# EAGLE board inverter-1kw (EAGLE 9.6.2), part 1 of 2
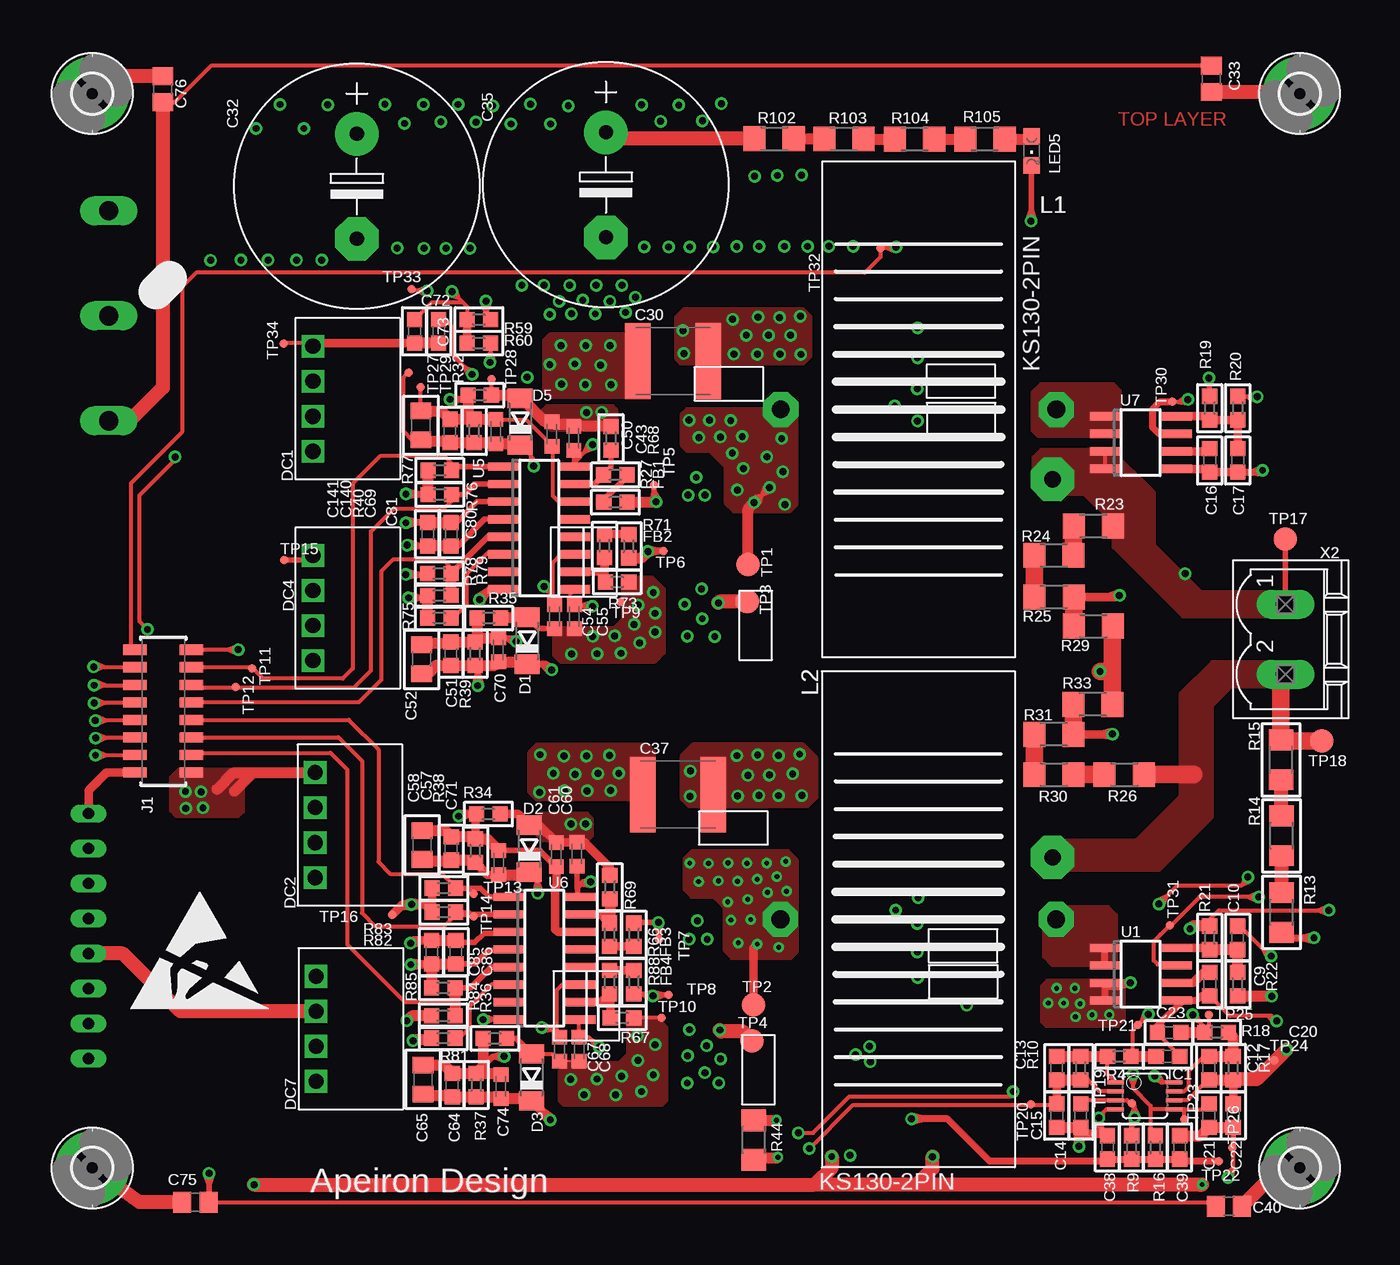
[diagram p0: board, top side]
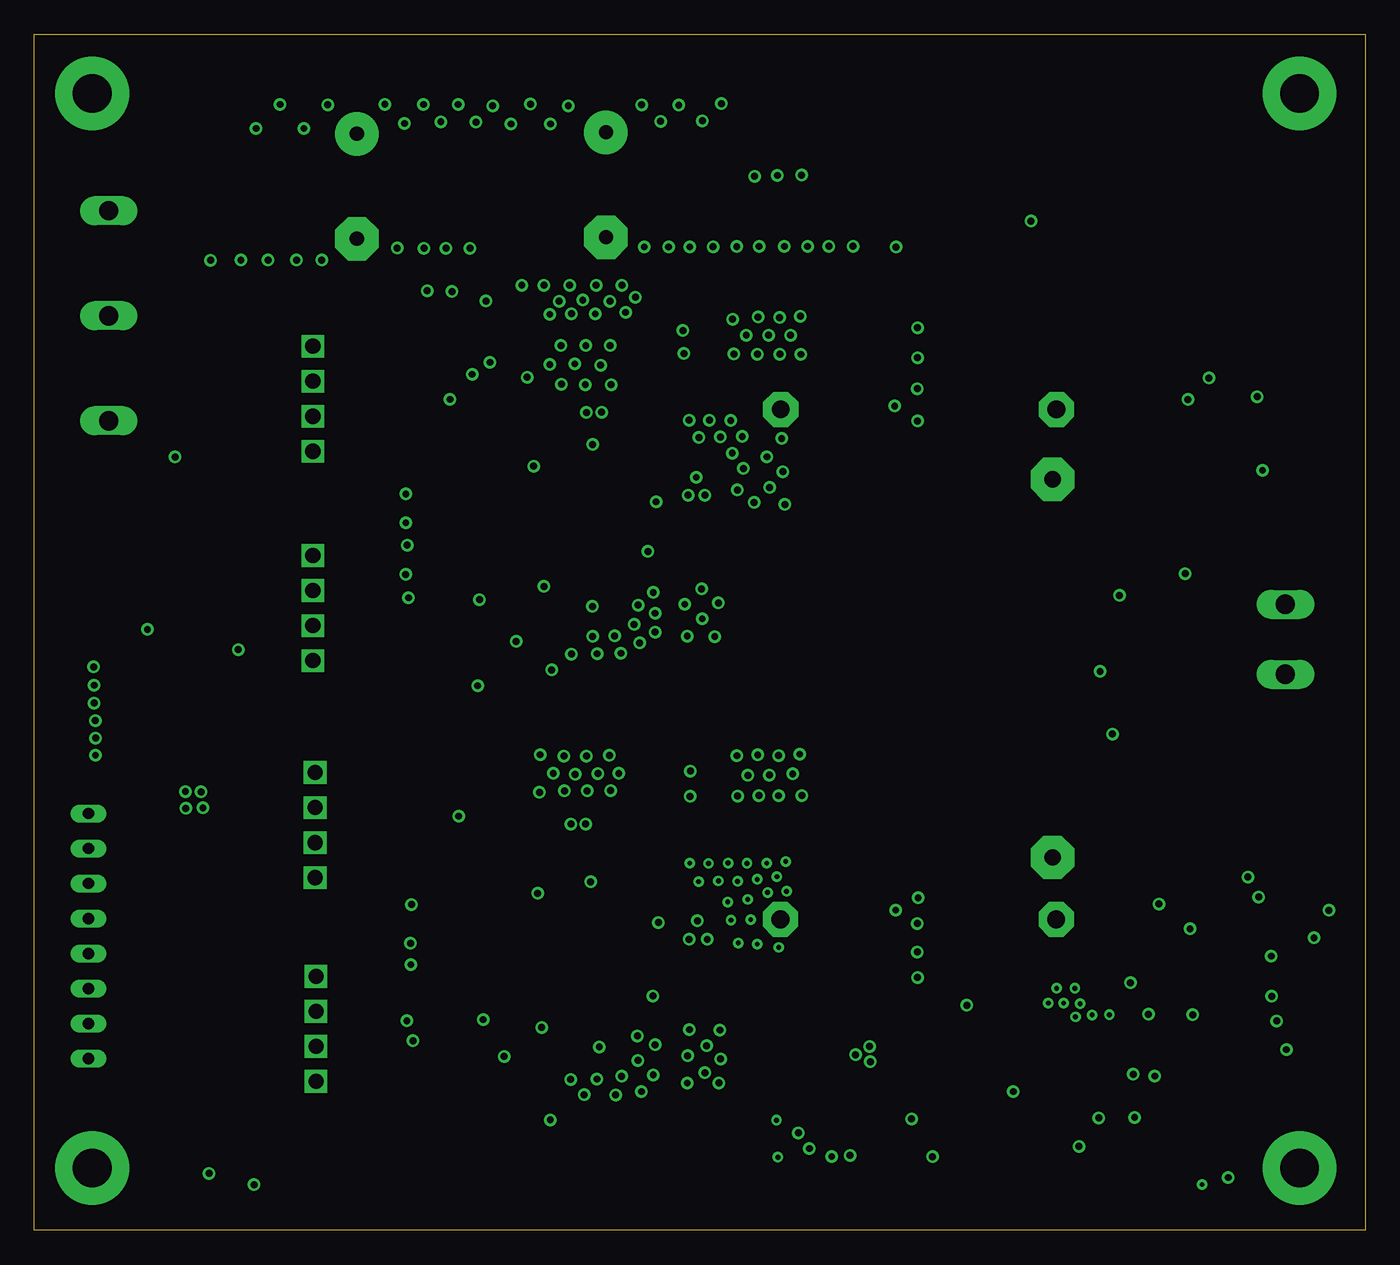
[diagram p1: board, inner layer Route3]
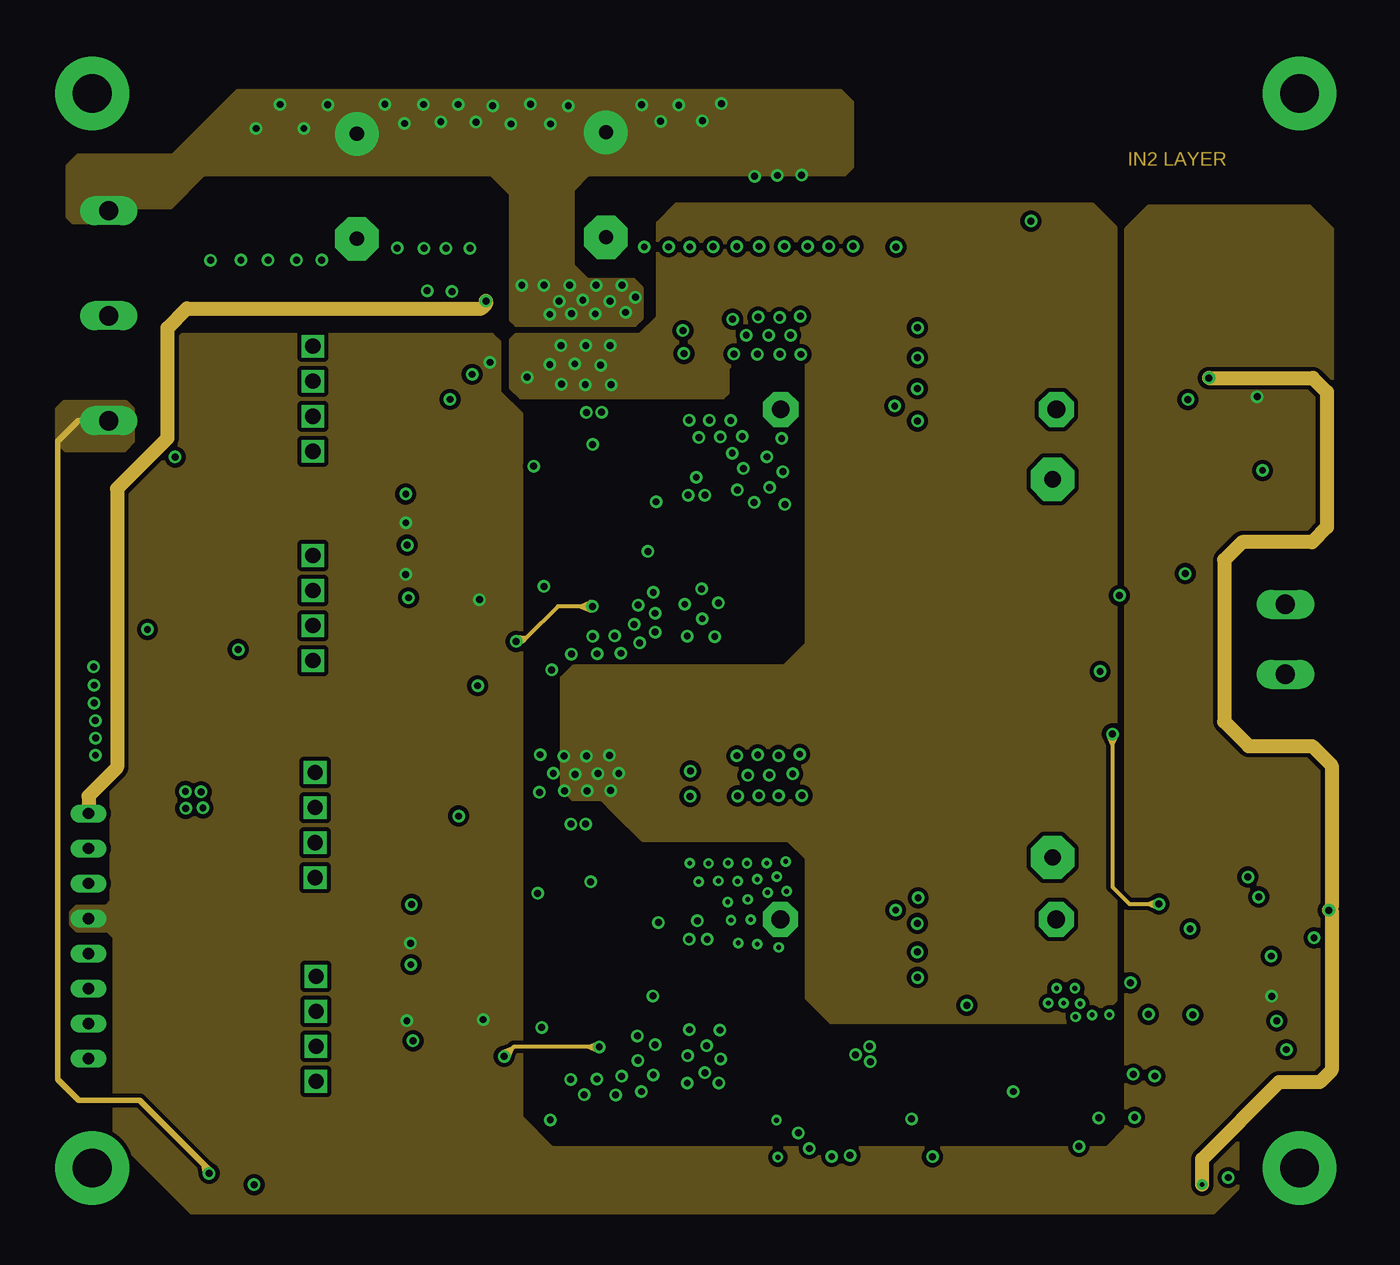
[diagram p2: board, inner layer IN2]
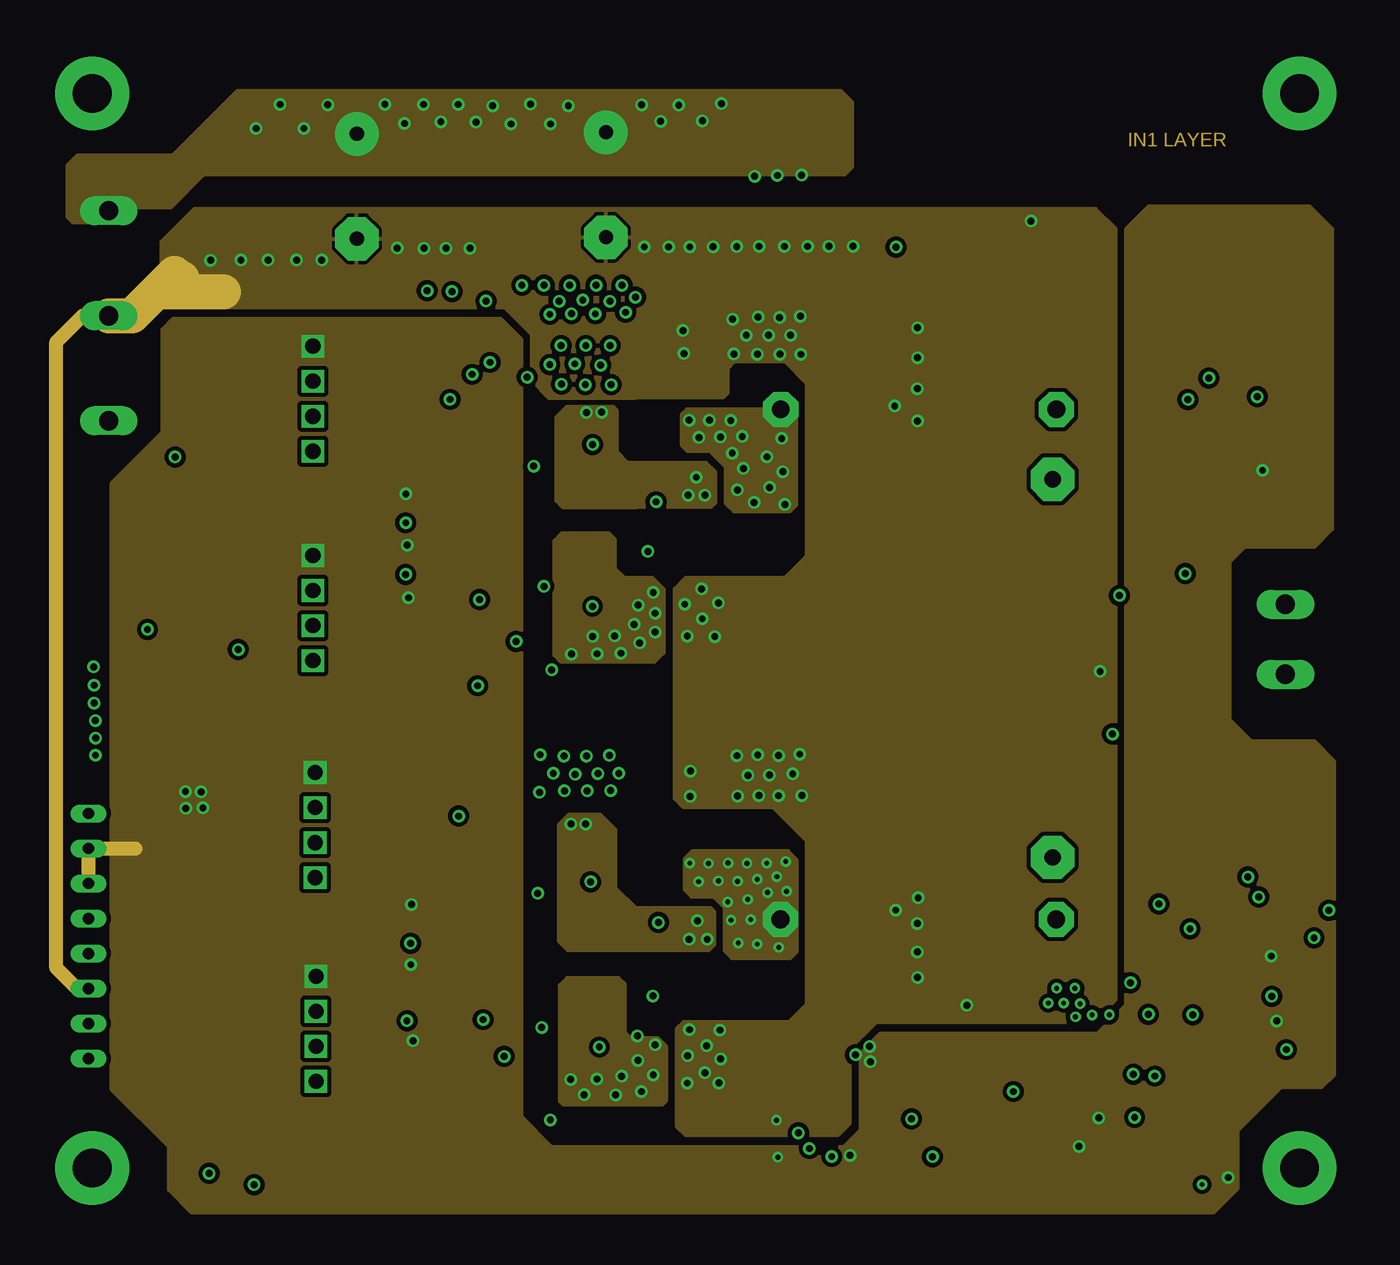
[diagram p3: board, inner layer IN1]
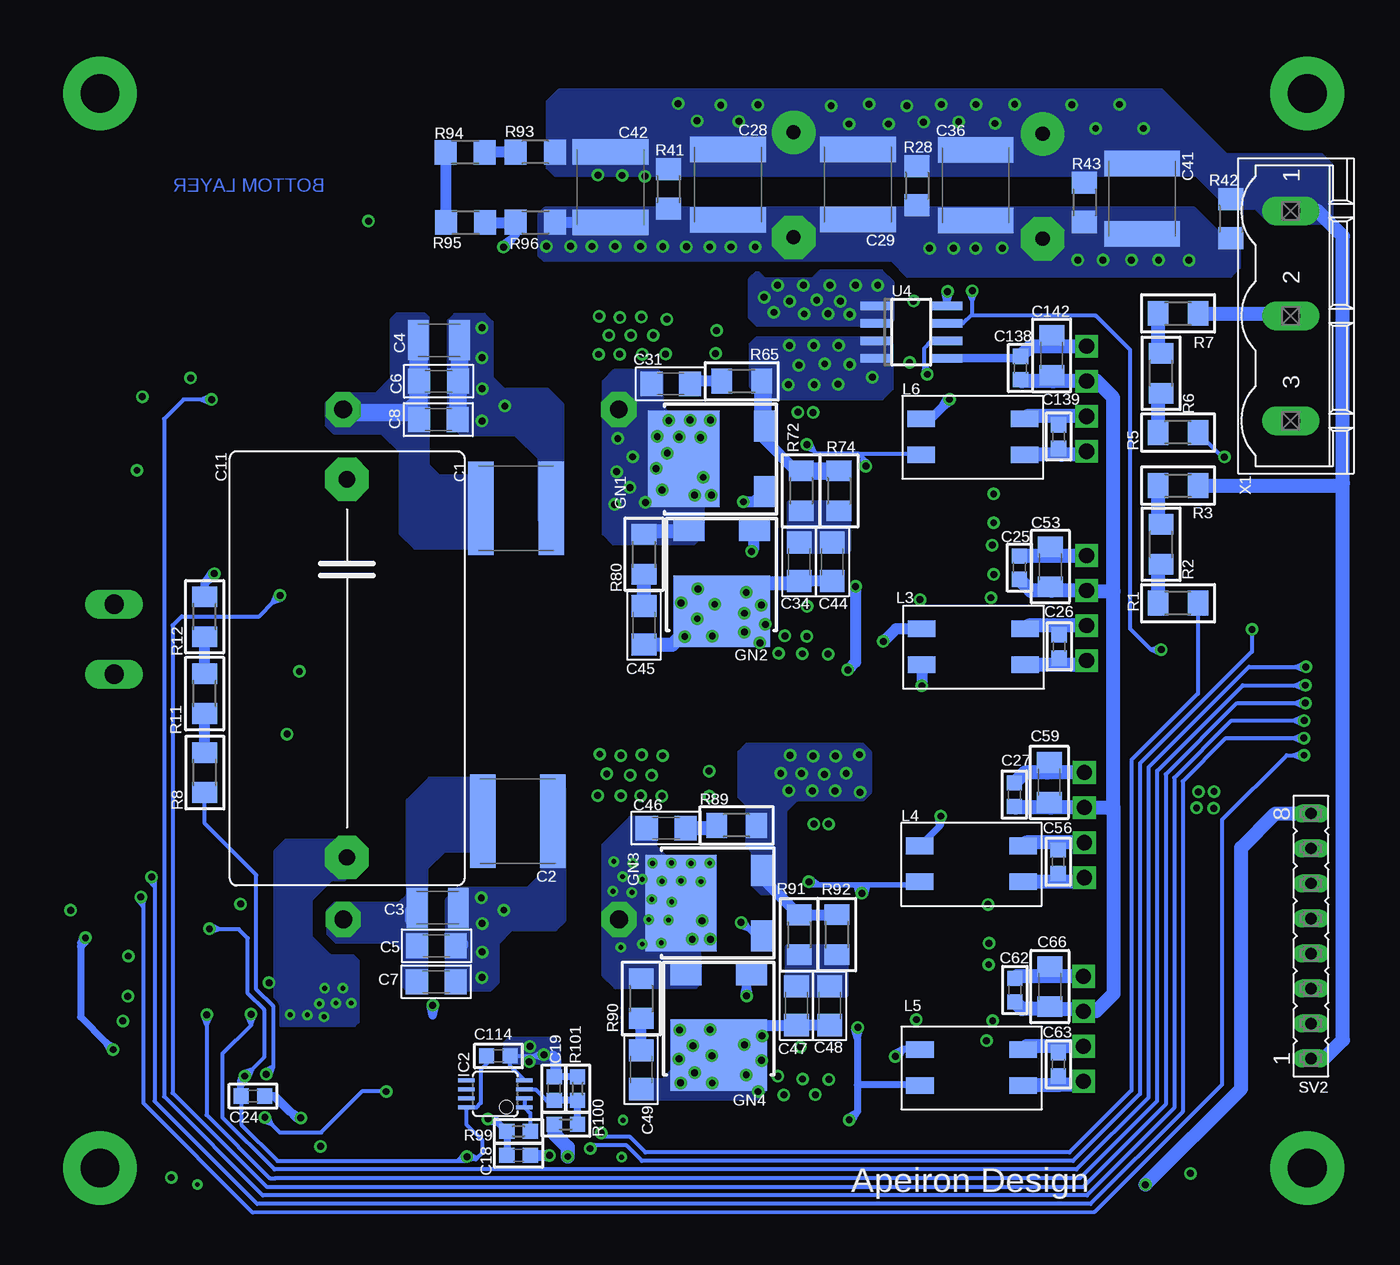
[diagram p4: board, bottom side, seen from below]

No outline drawn. Coordinates in mm, seen from the top.
Copper layers (1+2*3*14+16): Top 0.035mm / dielectric 0.2mm / Route2 0.035mm / dielectric 1mm / Route3 0.035mm / dielectric 0.2mm / IN2 0.035mm / dielectric 0.15mm / Bottom 0.035mm
Design rules "default *": minimum track width 6mil, minimum drill 0.35mm, track to track 11mil, track to pad 11mil, pad to pad 11mil, via to via 11mil, smd to smd 11mil, copper to edge 40mil, drill to drill 6mil, minimum pad ring 10mil, minimum via ring 8mil, stop-mask expansion 4mil, vias tented up to drill 0mil, thermal gap 10mil
tRestrict: 3 lines
bRestrict: 3 lines

## Footprints (pad centres in the part's own frame; a part is rotated, then mirrored left to right if it is on the bottom)
C2225K = smd 1.85 x 6.8: 1 -2.55,0; 2 2.55,0
C1210K = smd 1.5 x 2.9: 1 -1.5,0; 2 1.5,0
C1206 = smd 1.6 x 1.8: 1 -1.4,0; 2 1.4,0
C0603 = smd 1.1 x 1.1: 1 -0.85,0; 2 0.85,0
C27.5B17 = drill 1.194 pad 3.15 octagon: 1 -13.716,0; 2 13.716,0
C2220K = smd 1.85 x 5.5: 1 -2.55,0; 2 2.55,0
E7,5-18 = drill 1.016 pad 3.15: + -3.81,0 | drill 1.016 pad 3.15 octagon: - 3.81,0
C0805 = smd 1.3 x 1.5: 1 -0.95,0; 2 0.95,0
C0603K = smd 1.05 x 1.08: 1 -0.875,0; 2 0.875,0
C0805' = smd 1.2 x 1.5: 1 -1.05,0; 2 1.05,0
C1206' = smd 1.5 x 1.8: 1 -1.45,0; 2 1.45,0
SOD80C = smd 1.4 x 1.8: A 1.7,0; C -1.7,0
RI-0512S/P_DC_DC_5V_12V = drill 1.1 square: 1-IN -3.81,1.27; 2+IN -1.27,1.27; 3-VOUT 1.27,1.27; 4+VOU 3.81,1.27
R0603 = smd 1.1 x 1.1: 1 -0.85,0; 2 0.85,0
TP65H300G4LSG = smd 2.25 x 1.5: D 2.375,-3.25; G -2.375,-3.25 | smd 7 x 5.18: S 0,2.59
2,8-PAD = drill 2.8 pad 5.334: B2,8 0,0
MSOP08 = smd 0.3 x 1.2: 1 -0.976,-2.113; 2 -0.326,-2.113; 3 0.324,-2.113; 4 0.974,-2.113; 5 0.974,2.112; 6 0.324,2.112; 7 -0.326,2.112; 8 -0.976,2.112
62301621021 = smd 0.74 x 1.7: 1 -4.445,-2.05; 2 -4.445,2.05; 3 -3.175,-2.05; 4 -3.175,2.05; 5 -1.905,-2.05; 6 -1.905,2.05; 7 -0.635,-2.05; 8 -0.635,2.05; 9 0.635,-2.05; 10 0.635,2.05; 11 1.905,-2.05; 12 1.905,2.05; 13 3.175,-2.05; 14 3.175,2.05; 15 4.445,-2.05; 16 4.445,2.05
KS130-2PIN = drill 1.3 pad 2.54 octagon: 1 -10,0; 2 10,0
ARYA_COMMON_FILTER = smd 2 x 1.2: 1 -3.75,1.27; 2 -3.75,-1.34; 3 3.75,-1.34; 4 3.75,1.27
CHIPLED_0805 = smd 1.2 x 1.2: A 0,-1.05; C 0,1.05
R1206 = smd 1.5 x 1.8: 1 -1.447,0; 2 1.447,0
R1206' = smd 1.6 x 1.803: 1 -1.422,0; 2 1.422,0
FE08 = drill 0.813 long: 1 -8.89,0; 2 -6.35,0; 3 -3.81,0; 4 -1.27,0; 5 1.27,0; 6 3.81,0; 7 6.35,0; 8 8.89,0
TP17R = smd 1.7 x 1.7: TP 0,0
TP06R = smd 0.6 x 0.6: TP 0,0
SOIC8 = smd 0.6 x 2.2: 1 -1.885,-2.6; 2 -0.615,-2.6; 3 0.655,-2.6; 4 1.925,-2.6; 5 1.925,2.6; 6 0.655,2.6; 7 -0.615,2.6; 8 -1.885,2.6
SI8230-N = smd 0.6 x 2.2: 1 -3.945,-2.45; 2 -2.675,-2.45; 3 -1.405,-2.45; 4 -0.135,-2.45; 5 1.135,-2.45; 6 2.405,-2.45; 7 3.675,-2.45; 8 4.945,-2.45; 9 4.945,2.75; 10 3.675,2.75; 11 2.405,2.75; 12 1.135,2.75; 13 -0.135,2.75; 14 -1.405,2.75; 15 -2.675,2.75; 16 -3.945,2.75
GMSTBV3 = drill 1.397 long: 1 -7.62,0; 2 0,0; 3 7.62,0
MSTBV2 = drill 1.397 long: 1 -2.54,0; 2 2.54,0

## Placement (x,y rotation side)
C1  [C2225K]  61.58,52.4 0 bottom
C2  [C2225K]  61.46,29.7 180 bottom
C3  https://www.ozdisan.com/passive-components/capacitors/smt-smd-and-mlcc-capacitors/C1210C473KCRACTU  [C1210K]  67.27,23.41 180 bottom
C4  https://www.ozdisan.com/passive-components/capacitors/smt-smd-and-mlcc-capacitors/C1210C473KCRACTU  [C1210K]  67.19,64.58 0 bottom
C5  https://www.ozdisan.com/passive-components/capacitors/smt-smd-and-mlcc-capacitors/C3216B103K631NT  [C1206]  67.37,20.65 180 bottom
C6  https://www.ozdisan.com/passive-components/capacitors/smt-smd-and-mlcc-capacitors/C3216B103K631NT  [C1206]  67.21,61.61 0 bottom
C7  https://www.ozdisan.com/passive-components/capacitors/smt-smd-and-mlcc-capacitors/CL31C102JHHNNNE  [C1206]  67.39,18.04 180 bottom
C8  https://www.ozdisan.com/passive-components/capacitors/smt-smd-and-mlcc-capacitors/CL31C102JHHNNNE  [C1206]  67.23,58.83 0 bottom
C9  [C0603]  85.25,17.88 270 top
C10  [C0603]  87.28,21.23 90 top
C11  [C27.5B17]  73.85,40.78 270 bottom
C12  150pF  [C0603]  85.21,11.79 90 top
C13  150pF  [C0603]  74.16,11.78 90 top
C14  100n / 50V  [C0603]  75.91,8.33 90 top
C15  100n / 50V  [C0603]  74.16,8.33 270 top
C16  [C0603]  85.25,55.87 270 top
C17  [C0603]  87.3,55.87 270 top
C18  [C0603]  61.41,5.45 0 bottom
C19  [C0603]  58.82,10.29 90 bottom
C20  [C0603]  82.22,12.63 0 top
C21  100n / 50V  [C0603]  85.21,8.34 90 top
C22  100n / 50V  [C0603]  86.96,8.34 270 top
C23  [C0603]  82.32,14.37 180 top
C24  2u2 / 25V  [C0603]  80.68,9.75 0 bottom
C25  0.1uF  [C0603]  25.07,48.09 90 bottom
C26  0.1uF  [C0603]  22.19,42.37 90 bottom
C27  0.1uF  [C0603]  25.44,31.62 90 bottom
C28  [C2220K]  46.22,75.88 270 bottom
C29  [C2220K]  36.78,75.89 270 bottom
C30  [C2220K]  46.33,63.08 0 top
C31  22p  [C1206]  50.38,61.42 180 bottom
C32  [E7,5-18]  23.39,75.75 270 top
C33  100n  [C0805]  85.38,83.55 270 top
C34  [C1206]  41.05,48.51 270 bottom
C35  [E7,5-18]  41.45,75.86 270 top
C36  [C2220K]  28.25,75.84 270 bottom
C37  [C2220K]  46.69,31.62 0 top
C38  100n / 50V  [C0603]  77.84,6.03 270 top
C39  100n / 50V  [C0603]  83.07,6.03 270 top
C40  100n  [C0805]  86.65,1.76 0 top
C41  [C2220K]  16.17,74.86 270 bottom
C42  [C2220K]  54.74,75.69 270 bottom
C43  1200920567**CAP 0603 CER 1uF 25V %10X7R  [C0603K]  39.13,57.47 90 top
C44  [C1206]  38.65,48.51 270 bottom
C45  [C1206]  52.31,43.9 270 bottom
C46  22p  [C1206]  50.71,29.19 180 bottom
C47  [C1206]  41.24,16.3 270 bottom
C48  [C1206]  38.84,16.3 270 bottom
C49  22p  [C1206]  52.51,11.66 270 bottom
C50  1200920567**CAP 0603 CER 1uF 25V %10X7R  [C0603K]  37.54,57.78 270 top
C51  0.1uF  [C0603]  30.21,41.84 90 top
C52  10uF  [C0805']  28.09,41.43 90 top
C53  22uF  [C1206']  22.83,48.16 90 bottom
C54  1200920567**CAP 0603 CER 1uF 25V %10X7R  [C0603K]  37.73,44.53 270 top
C55  1200920567**CAP 0603 CER 1uF 25V %10X7R  [C0603K]  39.17,44.53 90 top
C56  0.1uF  [C0603]  22.26,26.75 90 bottom
C57  0.1uF  [C0603]  30.24,27.71 90 top
C58  10uF  [C0805']  28.12,27.97 90 top
C59  22uF  [C1206']  22.91,32.51 90 bottom
C60  1200920567**CAP 0603 CER 1uF 25V %10X7R  [C0603K]  39.35,27.31 90 top
C61  1200920567**CAP 0603 CER 1uF 25V %10X7R  [C0603K]  37.86,27.27 270 top
C62  0.1uF  [C0603]  25.4,17.44 90 bottom
C63  0.1uF  [C0603]  22.24,12.05 90 bottom
C64  0.1uF  [C0603]  30.31,10.55 90 top
C65  10uF  [C0805']  28.19,10.96 90 top
C66  22uF  [C1206']  22.86,17.69 90 bottom
C67  1200920567**CAP 0603 CER 1uF 25V %10X7R  [C0603K]  38.09,13.16 270 top
C68  1200920567**CAP 0603 CER 1uF 25V %10X7R  [C0603K]  39.52,13.17 90 top
C69  100n  [C0603K]  33.47,57.96 90 top
C70  100n  [C0603K]  33.66,42.12 90 top
C71  100n  [C0603K]  33.68,26.68 90 top
C72  [C0603]  29.33,65.23 270 top
C73  [C0603]  27.58,65.23 270 top
C74  100n  [C0603K]  33.84,10.45 90 top
C75  100n  [C0805]  11.68,2.05 0 top
C76  100n  [C0805]  9.31,82.8 270 top
C80  100n  [C0603]  30.23,50.52 270 top
C81  100n  [C0603]  28.53,50.52 270 top
C85  100n  [C0603]  28.82,20.2 270 top
C86  100n  [C0603]  30.57,20.2 270 top
C114  2u2 / 25V  [C0603]  62.87,12.66 0 bottom
C138  0.1uF  [C0603]  24.99,62.57 90 bottom
C139  0.1uF  [C0603]  22.23,57.6 90 bottom
C140  0.1uF  [C0603]  30.15,58 90 top
C141  10uF  [C0805']  28.03,58.41 90 top
C142  22uF  [C1206']  22.73,63.48 90 bottom
D1  [SOD80C]  35.74,42.78 90 top
D2  [SOD80C]  35.89,27.7 90 top
D3  [SOD80C]  36.06,11.11 90 top
D5  [SOD80C]  35.24,58.68 90 top
DC1  RI-0512S/P_DC_DC_5V_12V  [RI-0512S/P_DC_DC_5V_12V]  18.93,60.34 270 top
DC2  RI-0512S/P_DC_DC_5V_12V  [RI-0512S/P_DC_DC_5V_12V]  19.09,29.41 270 top
DC4  RI-0512S/P_DC_DC_5V_12V  [RI-0512S/P_DC_DC_5V_12V]  18.93,45.15 270 top
DC7  RI-0512S/P_DC_DC_5V_12V  [RI-0512S/P_DC_DC_5V_12V]  19.16,14.63 270 top
FB1  180  [R0603]  42.15,52.84 0 top
FB2  180  [R0603]  43.12,49.65 270 top
FB3  180  [R0603]  43.48,21.45 90 top
FB4  [R0603]  43.48,18.02 270 top
GN1  TP65H300G4LSG  [TP65H300G4LSG]  46.84,55.97 90 bottom
GN2  TP65H300G4LSG  [TP65H300G4LSG]  46.69,47.51 180 bottom
GN3  TP65H300G4LSG  [TP65H300G4LSG]  47.03,23.76 90 bottom
GN4  TP65H300G4LSG  [TP65H300G4LSG]  46.88,15.3 180 bottom
H1  MOUNT-PAD-ROUND2.8  [2,8-PAD]  91.79,82.48 0 top
H2  MOUNT-PAD-ROUND2.8  [2,8-PAD]  91.79,4.54 0 top
H3  MOUNT-PAD-ROUND2.8  [2,8-PAD]  4.19,4.54 0 top
H4  MOUNT-PAD-ROUND2.8  [2,8-PAD]  4.19,82.48 0 top
IC1  LMV358MMX  [MSOP08]  80.55,9.77 270 top
IC2  LMV358MMX  [MSOP08]  63.09,9.91 90 bottom
J1  [62301621021]  9.35,37.68 90 top
L1  KS130-2PIN  [KS130-2PIN]  64.14,59.57 0 top
L2  KS130-2PIN  [KS130-2PIN]  64.12,22.58 0 top
L3  ARYA_COMMON_FILTER  [ARYA_COMMON_FILTER]  28.4,42.31 180 bottom
L4  ARYA_COMMON_FILTER  [ARYA_COMMON_FILTER]  28.56,26.56 180 bottom
L5  ARYA_COMMON_FILTER  [ARYA_COMMON_FILTER]  28.54,11.79 180 bottom
L6  ARYA_COMMON_FILTER  [ARYA_COMMON_FILTER]  28.46,57.55 180 bottom
LED5  [CHIPLED_0805]  72.34,78.33 180 top
R1  20k  [R1206]  13.57,45.51 0 bottom
R2  430k  [R1206]  14.79,49.78 270 bottom
R3  430k  [R1206]  13.57,54.04 180 bottom
R4  [R0603]  78.7,12.63 0 top
R5  20k  [R1206]  13.57,57.89 0 bottom
R6  430k  [R1206]  14.79,62.19 270 bottom
R7  430k  [R1206]  13.57,66.53 180 bottom
R8  20k  [R1206]  84.17,33.22 270 bottom
R9  2k  [R0603]  79.59,6.03 270 top
R10  2k  [R0603]  75.9,11.78 90 top
R11  430k  [R1206]  84.18,38.95 270 bottom
R12  430k  [R1206]  84.18,44.53 270 bottom
R13  20k  [R1206]  90.47,23.07 270 top
R14  430k  [R1206]  90.47,28.63 270 top
R15  430k  [R1206]  90.43,34.14 270 top
R16  2k  [R0603]  81.32,6.03 270 top
R17  2k  [R0603]  86.96,11.79 90 top
R18  [R0603]  85.76,14.37 180 top
R19  [R0603]  85.25,59.66 90 top
R20  [R0603]  87.3,59.66 90 top
R21  [R0603]  85.25,21.23 90 top
R22  [R0603]  87.28,17.88 270 top
R23  [R1206']  76.82,51.1 0 top
R24  [R1206']  73.96,48.98 180 top
R25  [R1206']  73.97,45.95 0 top
R26  [R1206']  79.05,33.07 180 top
R27  15  [R0603]  42.14,54.82 0 top
R28  [R1206']  32.5,75.8 90 bottom
R29  [R1206']  76.82,43.85 180 top
R30  [R1206']  73.96,33.07 180 top
R31  [R1206']  73.95,35.99 0 top
R32  10k  [R0603]  32.3,60.6 0 top
R33  [R1206']  76.78,38.17 0 top
R34  10k  [R0603]  32.93,30.21 0 top
R35  10k  [R0603]  32.96,44.43 0 top
R36  10k  [R0603]  33.4,13.93 0 top
R37  2k2  [R0603]  32.05,10.55 270 top
R38  2k2  [R0603]  31.99,27.55 270 top
R39  2k2  [R0603]  31.96,41.84 270 top
R40  2k2  [R0603]  31.9,58 270 top
R41  [R1206']  50.53,75.56 90 bottom
R42  [R1206']  9.73,73.4 90 bottom
R43  [R1206']  20.35,74.59 90 bottom
R44  0R  [R1206']  52.18,6.56 270 top
R59  [R0603]  32.24,66.08 0 top
R60  [R0603]  32.24,64.38 0 top
R65  15  [R1206]  45.22,61.61 0 bottom
R66  15  [R0603]  41.73,21.45 270 top
R67  10k  [R0603]  42.63,15.43 180 top
R68  10k  [R0603]  41.82,57.47 90 top
R69  10k  [R0603]  41.74,24.9 270 top
R71  15  [R0603]  41.36,49.66 90 top
R72  15  [R1206]  40.9,53.66 90 bottom
R73  10k  [R0603]  42.27,47.05 0 top
R74  15  [R1206]  38.16,53.66 90 bottom
R75  12k  [R0603]  29.38,44.44 0 top
R76  10k  [R0603]  29.4,53.4 0 top
R77  10k  [R0603]  29.4,55.15 0 top
R78  10k  [R0603]  29.38,47.65 180 top
R79  10k  [R0603]  29.38,46.06 0 top
R80  15  [R1206]  52.31,49.05 90 bottom
R81  12k  [R0603]  29.66,13.96 0 top
R82  10k  [R0603]  29.7,23.09 0 top
R83  10k  [R0603]  29.7,24.83 0 top
R84  10k  [R0603]  29.66,15.57 180 top
R85  10k  [R0603]  29.67,17.61 0 top
R88  [R0603]  41.73,18.01 90 top
R89  15  [R1206]  45.59,29.39 0 bottom
R90  15  [R1206]  52.51,16.83 90 bottom
R91  15  [R1206]  41.05,21.45 90 bottom
R92  15  [R1206]  38.32,21.46 90 bottom
R93  [R1206']  60.19,78.23 0 bottom
R94  [R1206']  65.29,78.22 0 bottom
R95  [R1206']  65.26,73.13 180 bottom
R96  [R1206']  60.19,73.14 180 bottom
R99  2k  [R0603]  61.41,7.2 180 bottom
R100  2k  [R0603]  57.97,7.69 180 bottom
R101  2k  [R0603]  57.12,10.29 270 bottom
R102  [R1206']  53.66,79.2 180 top
R103  [R1206']  58.72,79.19 180 top
R104  [R1206']  63.85,79.18 180 top
R105  [R1206']  68.96,79.18 180 top
SV2  [FE08]  3.92,21.36 90 bottom
TP1  TPTP17R  [TP17R]  51.78,48.33 0 top
TP2  TPTP17R  [TP17R]  52.16,16.38 0 top
TP3  TPTP17R  [TP17R]  51.71,45.62 0 top
TP4  TPTP17R  [TP17R]  52.06,13.76 0 top
TP5  TPTP06R  [TP06R]  44.94,54.08 0 top
TP6  TPTP06R  [TP06R]  45.64,49.28 0 top
TP7  TPTP06R  [TP06R]  45.3,21.13 0 top
TP8  TPTP06R  [TP06R]  45.99,17.11 0 top
TP9  TPTP06R  [TP06R]  42.53,45.6 0 top
TP10  TPTP06R  [TP06R]  45.51,15.44 0 top
TP11  TPTP06R  [TP06R]  15.8,40.77 0 top
TP12  TPTP06R  [TP06R]  14.59,39.44 0 top
TP13  TPTP06R  [TP06R]  31.86,24.41 0 top
TP14  TPTP06R  [TP06R]  31.87,22.77 0 top
TP15  TPTP06R  [TP06R]  18.1,48.65 0 top
TP16  TPTP06R  [TP06R]  25.93,22.89 0 top
TP17  TPTP17R  [TP17R]  90.73,50.16 0 top
TP18  TPTP17R  [TP17R]  93.4,35.52 0 top
TP19  TPTP06R  [TP06R]  79.62,9.22 0 top
TP20  TPTP06R  [TP06R]  72.28,9.16 0 top
TP21  TPTP06R  [TP06R]  80.06,14.9 0 top
TP22  TPTP06R  [TP06R]  85.91,5.01 0 top
TP23  TPTP06R  [TP06R]  83.43,8.08 0 top
TP24  TPTP06R  [TP06R]  89.94,12.34 0 top
TP25  TPTP06R  [TP06R]  85.18,15.65 0 top
TP26  TPTP06R  [TP06R]  86.91,5.98 0 top
TP27  TPTP06R  [TP06R]  27.13,62.24 0 top
TP28  TPTP06R  [TP06R]  33.16,61.76 0 top
TP29  TPTP06R  [TP06R]  28.03,61.19 0 top
TP30  TPTP06R  [TP06R]  82.55,60.12 90 top
TP31  TPTP06R  [TP06R]  82.37,22.13 90 top
TP32  TPTP06R  [TP06R]  61.39,71.28 0 top
TP33  TPTP06R  [TP06R]  27.35,68.3 90 top
TP34  TPTP06R  [TP06R]  18.09,64.35 0 top
U1  ACS712  [SOIC8]  80.25,18.62 270 top
U4  ACS712  [SOIC8]  32.92,65.2 270 bottom
U5  SI8230  [SI8230-N]  36.47,51.47 270 top
U6  SI8230  [SI8230-N]  36.85,20.25 270 top
U7  ACS712  [SOIC8]  80.25,57.18 270 top
U$1  [ESD_10.00]  6.9,15.97 0 top
X1  GMSTBV3  [GMSTBV3]  5.39,66.36 270 bottom
X2  MSTBV2  [MSTBV2]  90.75,42.89 270 top

## Library data of the parts
C1-C4 C9 C10 C12-C30 C32 C33 C35-C43 C50-C76 C80 C81 C85 C86 C114 C138-C142 FB1-FB4 R1-R22 R27 R32 R34-R40 R59 R60 R65-R69 R71-R85 R88-R92 R99-R101 = rcl
C5-C8 C31 C34 C44-C49 = rcl; SPICEPREFIX: C
C11 = capacitor-wima
D1-D3 D5 = diode
DC1 DC2 DC4 DC7 GN1-GN4 = my_parts1
H1-H4 = holes
IC1 IC2 = linear
J1 = Eagle_WR-PHD (rev19a); DATASHEET-URL: https://katalog.we-online.com/em/datasheet/62301621021.pdf; GENDER: Socket Header; IR: 1A; MATES: WR-PHD 1.27mm SMT Dual Pin Header,H=3.8mm/SMT Dual Pin Header,H=3.8mm(Reel)/THT Dual Pin Header; PACKAGING: Tube; PART-NUMBER: 62301621021; PINS: 16; ROWS: Dual; TYPE: Straight
L1 L2 = Andromeda
L3-L6 = enko
LED5 = led
R23-R26 R28-R31 R33 R41-R44 R93-R96 R102-R105 = rcl; SPICEPREFIX: R
SV2 = con-lsta; OC_FARNELL: unknown; OC_NEWARK: unknown
TP1-TP34 = testpad
U1 U4-U7 = enko01
U$1 = logo
X1 = con-phoenix-762; MPN: GMSTBVA2,5/3-G-7,62; OC_FARNELL: 1793080; OC_NEWARK: 69R9521
X2 = con-phoenix-508; MPN: MSTBV 2,5/2-GF-5.08; OC_FARNELL: 1792792; OC_NEWARK: 69R9845

## Nets
+3V3: C24.1 C114.1 IC1.8 IC2.8 J1.2 R19.2 R21.2 R59.2 R100.2 SV2.8
+5V: C80.1 C81.1 C85.1 C86.1 R20.2 R22.2 R60.2 R78.2 R84.2 SV2.5 U5.3 U5.8 U6.3 U6.8
AGND: C1.2 C2.1 C3.1 C4.2 C5.1 C6.2 C7.1 C8.2 C28.2 C29.2 C30.2 C32.- C34.2 C35.- C36.2 C37.2 C41.2 C42.2 C44.2 C45.2 C47.2 C48.2 C49.2 C54.2 C55.1 C67.2 C68.1 D1.A D3.A GN2.S GN4.S LED5.C R7.1 R28.1 R29.1 R33.2 R35.2 R36.2 R41.1 R42.1 R43.1 R44.1 R67.1 R73.2 R96.1 SV2.3 TP3.TP TP4.TP TP9.TP TP10.TP X1.2
DGND: C9.2 C10.2 C14.1 C15.2 C16.2 C17.2 C18.2 C19.2 C20.2 C21.1 C22.2 C23.2 C24.2 C25.2 C27.2 C38.1 C39.1 C53.2 C59.2 C62.2 C66.2 C72.2 C73.2 C80.2 C81.2 C85.2 C86.2 C114.2 C138.2 C142.2 DC1.1-IN DC2.1-IN DC4.1-IN DC7.1-IN IC1.4 IC2.4 J1.1 R44.2 R75.1 R76.1 R77.1 R79.1 R81.1 R82.1 R83.1 R85.1 R101.1 SV2.6 SV2.7 TP15.TP TP16.TP TP26.TP TP34.TP U1.5 U4.5 U5.4 U6.4 U7.5
DRV1_EN: J1.9 R78.1 R79.2 U5.5
DRV2_EN: J1.3 R84.1 R85.2 U6.5
G11_PWM: J1.13 R77.2 TP11.TP U5.1
G12_PWM: J1.11 R76.2 TP12.TP U5.2
G13_PWM: J1.7 R83.2 TP13.TP U6.1
G14_PWM: J1.5 R82.2 TP14.TP U6.2
IA_SENS: J1.8 TP30.TP U7.7
IB_SENS: J1.4 TP31.TP U1.7
IIN_SENS: J1.15 TP33.TP U4.7
N$1: C19.1 IC2.3 R100.1 R101.2
N$2: IC2.1 IC2.2 R99.1
N$3: C26.1 DC4.4+VOU L3.1
N$4: R93.1 R94.2
N$5: R75.2 U5.6
N$6: R23.1 R24.1
N$7: C14.2 IC1.3 R1.2 R9.1 TP19.TP
N$8: C9.1 U1.6
N$9: C13.1 C15.1 IC1.2 R5.2 R10.1 TP20.TP
N$10: R5.1 R6.2
N$11: R6.1 R7.2
N$12: R13.1 R14.2
N$13: R14.1 R15.2
N$14: C26.2 DC4.3-VOUT L3.2
N$15: R2.1 R3.2
N$16: R1.1 R2.2
N$17: R11.1 R12.2
N$18: C13.2 IC1.1 R4.1 R10.2
N$19: R8.1 R11.2
N$20: C21.2 IC1.5 R8.2 R16.1 TP23.TP
N$21: C16.1 U7.6
N$22: C56.1 DC2.4+VOU L4.1
N$23: C12.1 C22.1 IC1.6 R13.2 R17.1 TP24.TP
N$24: C10.1 R21.1 R22.1 U1.8
N$25: C12.2 IC1.7 R17.2 R18.1
N$26: R24.2 R25.1
N$27: R26.2 R30.1
N$28: R30.2 R31.1
N$29: R27.1 R68.1 U5.15
N$30: C17.1 R19.1 R20.1 U7.8
N$31: R94.1 R95.2
N$32: C56.2 DC2.3-VOUT L4.2
N$33: C63.1 DC7.4+VOU L5.1
N$34: FB1.1 R27.2
N$35: FB1.2 GN1.G TP5.TP
N$36: FB3.1 R66.2
N$37: FB3.2 GN3.G TP7.TP
N$39: C63.2 DC7.3-VOUT L5.2
N$40: C33.2 H1.B2,8
N$41: C40.2 H2.B2,8
N$42: C75.1 H3.B2,8
N$43: C76.1 H4.B2,8
N$54: R102.1 R103.2
N$56: R103.1 R104.2
N$57: R66.1 R69.2 U6.15
N$58: R104.1 R105.2
N$68: LED5.A R105.1
N$69: C73.1 R59.1 R60.1 U4.8
N$70: C72.1 U4.6
N$75: FB2.2 GN2.G TP6.TP
N$76: FB2.1 R71.2
N$78: R71.1 R73.1 U5.10
N$79: C34.1 C44.1 R72.1 R74.1
N$80: C31.1 R65.1
N$81: FB4.2 GN4.G TP8.TP
N$82: R81.2 U6.6
N$84: FB4.1 R88.2
N$85: C45.1 R80.1
N$86: R67.2 R88.1 U6.10
N$90: C46.1 R89.1
N$92: C49.1 R90.1
N$95: C47.1 C48.1 R91.1 R92.1
N$130: C139.1 DC1.4+VOU L6.1
N$138: C139.2 DC1.3-VOUT L6.2
PE: C33.1 C40.1 C75.2 C76.2 X1.3
SW_LEG_A: C31.2 C43.2 C50.1 D5.A GN1.S GN2.D L1.1 R32.2 R68.2 R80.2 TP1.TP TP28.TP
SW_LEG_B: C46.2 C60.2 C61.1 D2.A GN3.S GN4.D L2.1 R34.2 R69.1 R90.2 TP2.TP
VA_FILTER: C1.1 C4.1 C6.1 C8.1 L1.2 U7.1 U7.2
VA_OUT: C11.1 R12.1 R23.2 TP17.TP U7.3 U7.4 X2.1
VA_SENS: J1.10 R25.2 R29.2
VB_FILTER: C2.2 C3.2 C5.2 C7.2 L2.2 U1.1 U1.2
VB_OUT: C11.2 R15.1 R26.1 TP18.TP U1.3 U1.4 X2.2
VB_SENS: J1.6 R31.2 R33.1
VDD: C25.1 C27.1 C53.1 C59.1 C62.1 C66.1 C138.1 C142.1 DC1.2+IN DC2.2+IN DC4.2+IN DC7.2+IN SV2.4
VG1_M: C50.2 C69.2 C140.2 C141.2 L6.3 R32.1 R40.1 TP29.TP U5.14
VG1_P: C43.1 C69.1 C140.1 C141.1 D5.C L6.4 R40.2 TP27.TP U5.16
VG2_M: C51.2 C52.2 C55.2 C70.2 L3.3 R35.1 R39.1 U5.9
VG2_P: C51.1 C52.1 C54.1 C70.1 D1.C L3.4 R39.2 U5.11
VG3_M: C57.2 C58.2 C61.2 C71.2 L4.3 R34.1 R38.1 U6.14
VG3_P: C57.1 C58.1 C60.1 C71.1 D2.C L4.4 R38.2 U6.16
VG4_M: C64.2 C65.2 C68.2 C74.2 L5.3 R36.1 R37.1 U6.9
VG4_P: C64.1 C65.1 C67.1 C74.1 D3.C L5.4 R37.2 U6.11
VIN: C30.1 C37.1 GN1.D GN3.D R65.2 R72.2 R74.2 R89.2 R91.2 R92.2 U4.3 U4.4
VIN_SENS: J1.16 R95.1 R96.2 TP32.TP
VIN_SENS_DIFF: C20.1 J1.14 R4.2 TP21.TP
VOUT_SENS_DIFF: C23.1 J1.12 R18.2 TP25.TP
VREF: C18.1 C38.2 C39.2 R9.2 R16.2 R99.2 TP22.TP
VSUPPLY+: C28.1 C29.1 C32.+ C35.+ C36.1 C41.1 C42.1 R3.1 R28.2 R41.2 R42.2 R43.2 R93.2 R102.2 SV2.1 U4.1 U4.2 X1.1